# EAGLE board TestBench_rev2 (EAGLE 6.3)
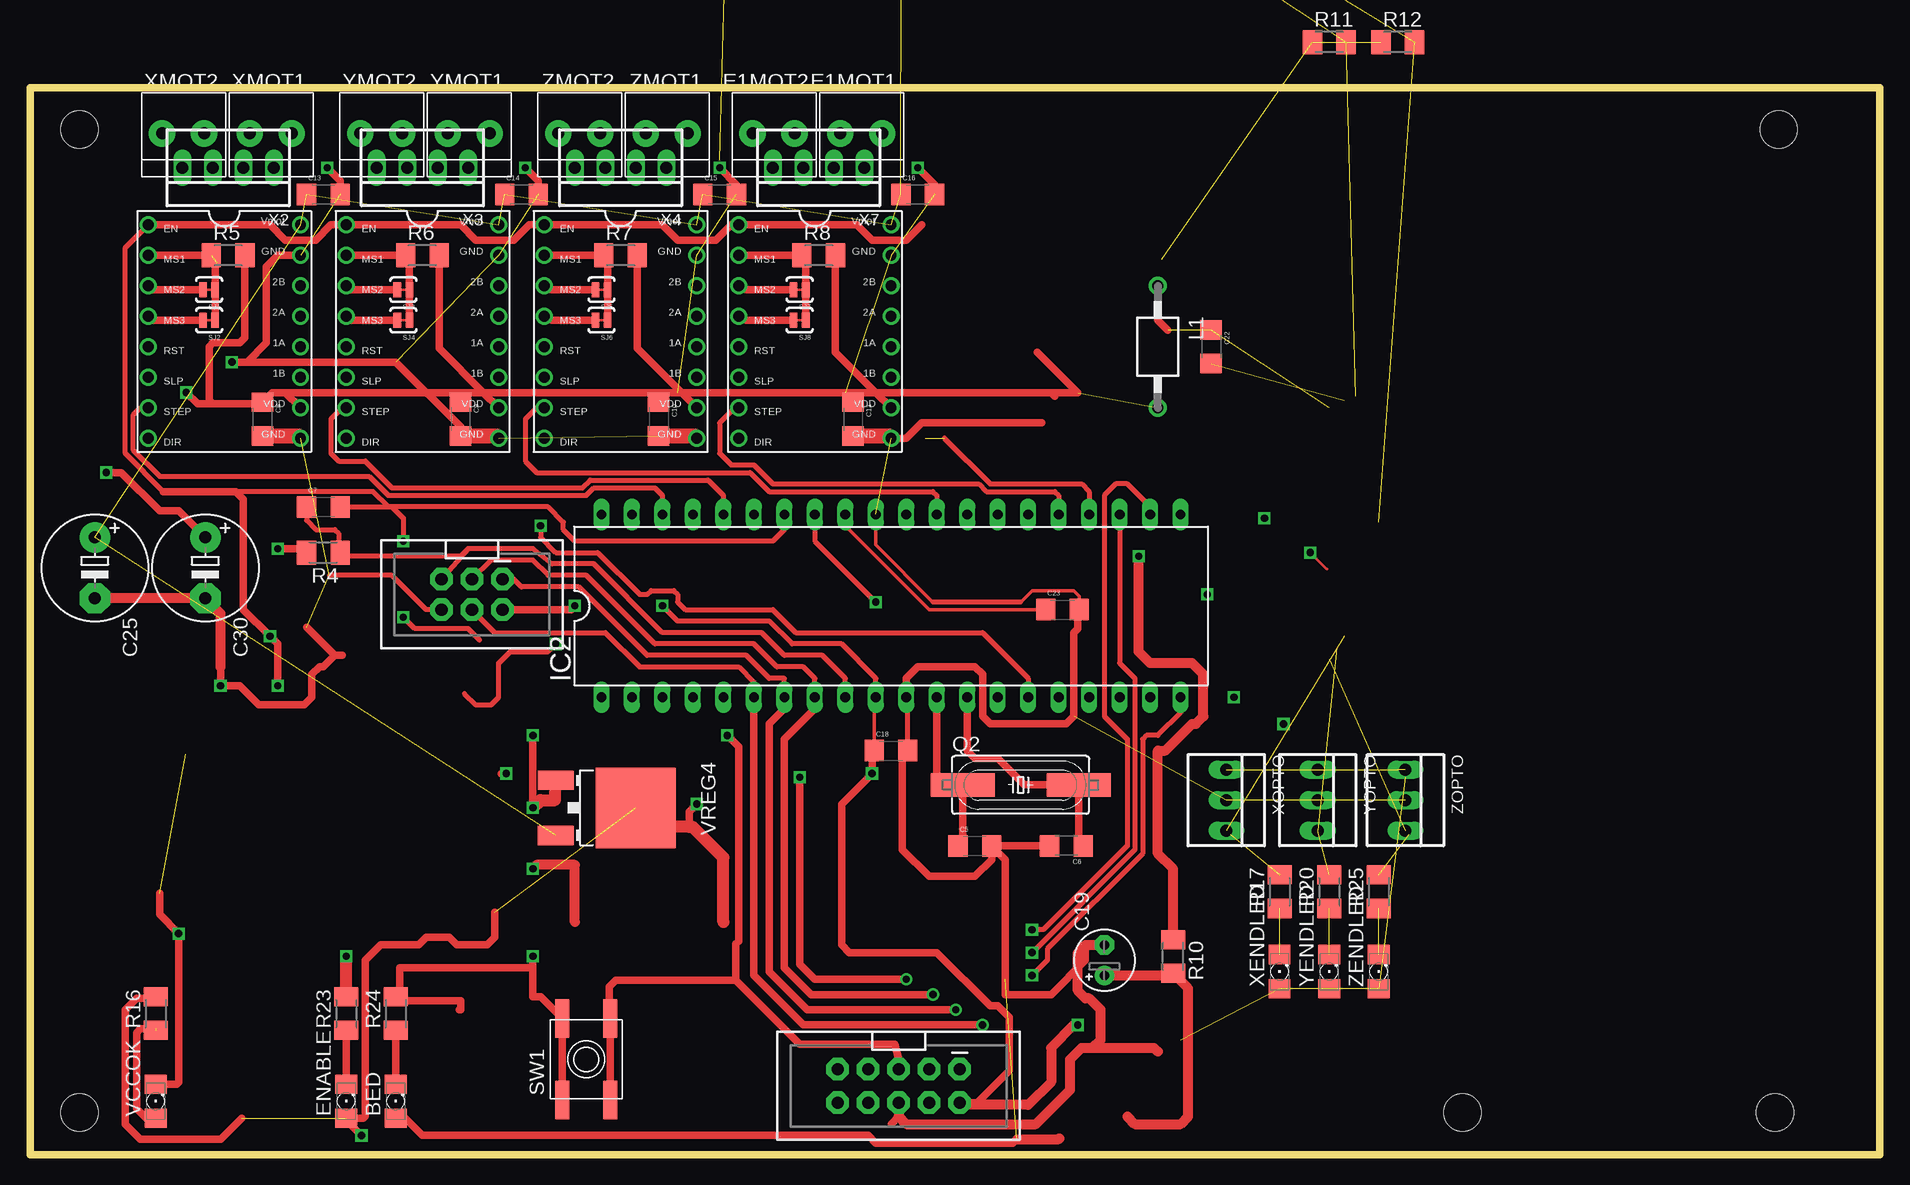
[diagram p0: board, top side]
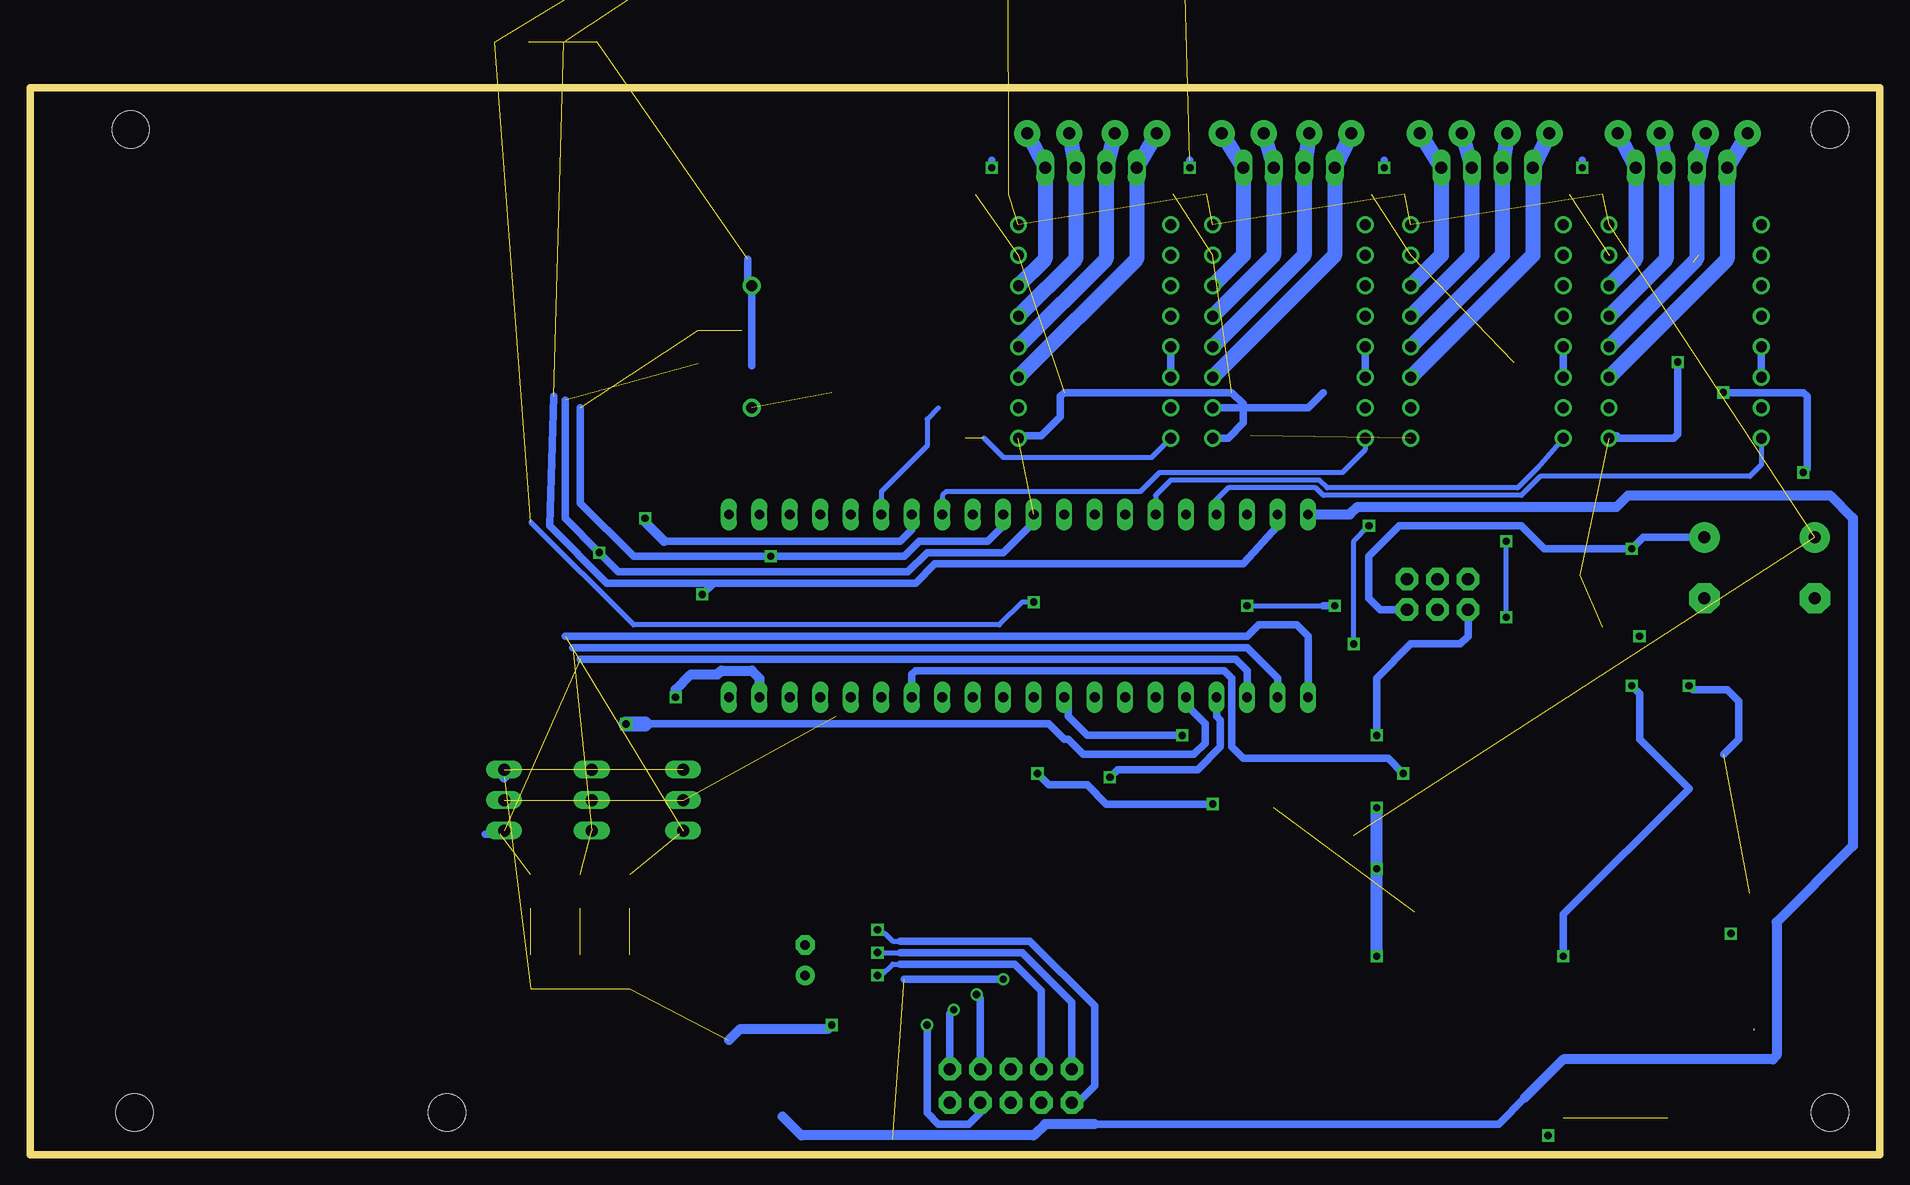
[diagram p1: board, bottom side, seen from below]

Size 154.13 x 88.89 mm. Coordinates in mm from the lower left corner, seen from the top.
Outline: 0,0 154.13,0 154.13,88.89 0,88.89 0,0
Copper layers (1*16): Top 0.035mm / dielectric 1.5mm / Bottom 0.035mm
Design rules "default *": minimum track width 10mil, minimum drill 24mil, track to track 20mil, track to pad 20mil, pad to pad 20mil, via to via 20mil, smd to smd 20mil, copper to edge 40mil, drill to drill 8mil, minimum pad ring 10mil, minimum via ring 8mil, stop-mask expansion 4mil, vias tented up to drill 0mil, thermal gap 10mil

## Footprints (pad centres in the part's own frame; a part is rotated, then mirrored left to right if it is on the bottom)
1206 = smd 1.6 x 1.803: A -1.422,0; C 1.422,0
1206' = smd 1.6 x 1.8: 1 -1.4,0; 2 1.4,0
E2,5-5 = drill 0.813 pad 1.6: + -1.27,0 | drill 0.813 pad 1.6 octagon: - 1.27,0
E5-8,5 = drill 1.016 pad 2.54: + -2.54,0 | drill 1.016 pad 2.54 octagon: - 2.54,0
3.5MMTERM = drill 1 pad 2.184: 1 1.8,0; 2 -1.7,0
A4988BREAKOUT = drill 0.9: 1A 8.89,1.27; 1B 11.43,1.27; 2A 6.35,1.27; 2B 3.81,1.27; DIR 16.51,-11.43; EN -1.27,-11.43; GND 16.51,1.27; GND@0 1.27,1.27; MS1 1.27,-11.43; MS2 3.81,-11.43; MS3 6.35,-11.43; RST 8.89,-11.43; SLP 11.43,-11.43; STEP 13.97,-11.43; VDD 13.97,1.27; VMOT -1.27,1.27
22-23-2021 = drill 1 long: 1 -1.27,0; 2 1.27,0
DIL40 = drill 0.813 long: 1 -24.13,-7.62; 2 -21.59,-7.62; 3 -19.05,-7.62; 4 -16.51,-7.62; 5 -13.97,-7.62; 6 -11.43,-7.62; 7 -8.89,-7.62; 8 -6.35,-7.62; 9 -3.81,-7.62; 10 -1.27,-7.62; 11 1.27,-7.62; 12 3.81,-7.62; 13 6.35,-7.62; 14 8.89,-7.62; 15 11.43,-7.62; 16 13.97,-7.62; 17 16.51,-7.62; 18 19.05,-7.62; 19 21.59,-7.62; 20 24.13,-7.62; 21 24.13,7.62; 22 21.59,7.62; 23 19.05,7.62; 24 16.51,7.62; 25 13.97,7.62; 26 11.43,7.62; 27 8.89,7.62; 28 6.35,7.62; 29 3.81,7.62; 30 1.27,7.62; 31 -1.27,7.62; 32 -3.81,7.62; 33 -6.35,7.62; 34 -8.89,7.62; 35 -11.43,7.62; 36 -13.97,7.62; 37 -16.51,7.62; 38 -19.05,7.62; 39 -21.59,7.62; 40 -24.13,7.62
2X3-SHROUDED = drill 1.016 pad 1.88 octagon: 1 -1.27,2.54; 2 1.27,2.54; 3 -1.27,0; 4 1.27,0; 5 -1.27,-2.54; 6 1.27,-2.54
BL01RN1A = drill 0.9 pad 1.5: 1 -5.08,0; 2 5.08,0
2X5-SHROUDED_LOCK = drill 1.016 pad 1.88 octagon: 1 -1.397,5.08; 2 1.397,5.08; 3 -1.397,2.54; 4 1.397,2.54; 5 -1.397,0; 6 1.397,0; 7 -1.397,-2.54; 8 1.397,-2.54; 9 -1.397,-5.08; 10 1.397,-5.08
HC49UP = smd 5.334 x 1.93: 1 -4.826,0; 2 4.826,0
M1206 = smd 1.6 x 2: 1 -1.4,0; 2 1.4,0
SJ_2S-TRACE = smd 0.635 x 1.27: 1 -0.508,0; 2 0.508,0
EVQ-Q2 = smd 3.2 x 1.2: A -3.4,-2; A' 3.4,-2; B -3.4,2; B' 3.4,2
3MMHOLE = hole 3.1: 0,0
W237-102 = drill 1.194 long: 1 -2.5,-1.27; 2 2.5,-1.27
DPAK = smd 1.6 x 3: 1 -2.3,-6.65; 3 2.3,-6.65 | smd 6.7 x 6.7: 2 0,0
22-23-2041 = drill 1 long: 1 -3.81,0; 2 -1.27,0; 3 1.27,0; 4 3.81,0
22-23-2031 = drill 1 long: 1 -2.54,0; 2 0,0; 3 2.54,0

## Placement (x,y rotation side)
BED  [1206]  30.48,4.45 90 top
C5  22  [1206']  78.74,25.72 0 top
C6  22  [1206']  86.36,25.72 180 top
C7  0.1u  [1206']  24.45,53.98 0 top
C8  0.1u  [1206']  19.37,61.28 270 top
C9  0.1u  [1206']  35.88,61.28 270 top
C10  0.1u  [1206']  52.39,61.28 270 top
C11  0.1u  [1206']  68.58,61.28 270 top
C13  0.1u  [1206']  24.45,80.01 0 top
C14  0.1u  [1206']  40.96,80.01 0 top
C15  0.1u  [1206']  57.47,80.01 0 top
C16  0.1u  [1206']  73.98,80.01 0 top
C18  0.1u  [1206']  71.75,33.66 0 top
C19  10u  [E2,5-5]  89.53,16.19 90 top
C20  10u  [E2,5-5]  58.74,127.64 90 top  (outside the outline)
C21  10u  [E2,5-5]  55.24,130.49 90 top  (outside the outline)
C22  0.1u  [1206']  98.42,67.31 270 top
C23  0.1u  [1206']  86.04,45.4 0 top
C25  100u  [E5-8,5]  5.4,48.9 270 top
C30  100u  [E5-8,5]  14.61,48.9 270 top
E1MOT1  1X2-3.5MM  [3.5MMTERM]  69.22,85.09 0 top
E1MOT2  1X2-3.5MM  [3.5MMTERM]  61.91,85.09 0 top
ENABLE  [1206]  26.35,4.45 90 top
EPOLOLU  POLOLU_A4983CARRIER  [A4988BREAKOUT]  70.48,76.2 270 top
EXTTHERM  22-23-2021  [22-23-2021]  55.88,132.72 270 top  (outside the outline)
EXTTHERM2  22-23-2021  [22-23-2021]  58.1,137.16 270 top  (outside the outline)
IC2  ATMEGA644-20PU  [DIL40]  71.75,45.72 0 top
J2  [2X3-SHROUDED]  36.83,46.67 270 top
L1  10uH  [BL01RN1A]  93.98,67.31 270 top
LCDCONNECTOR  M05X2SHD_LOCK  [2X5-SHROUDED_LOCK]  72.39,5.71 270 top
Q2  20mHz  [HC49UP]  82.55,30.8 0 top
R4  10k  [M1206]  24.45,50.16 180 top
R5  1K  [M1206]  16.51,74.93 0 top
R6  1K  [M1206]  32.7,74.93 0 top
R7  1K  [M1206]  49.21,74.93 0 top
R8  1K  [M1206]  65.72,74.93 0 top
R10  4k7  [M1206]  95.25,16.51 270 top
R11  4k7  [M1206]  108.27,92.71 0 top  (outside the outline)
R12  4k7  [M1206]  113.98,92.71 0 top  (outside the outline)
R16  1k  [M1206]  10.48,11.75 90 top
R17  1k  [M1206]  104.14,21.91 90 top
R20  1k  [M1206]  108.27,21.91 90 top
R23  1k  [M1206]  26.35,11.75 90 top
R24  1k  [M1206]  30.48,11.75 90 top
R25  1k  [M1206]  112.39,21.91 90 top
SJ1  SOLDERJUMPERTRACE  [SJ_2S-TRACE]  14.92,72.07 180 top
SJ2  SOLDERJUMPERTRACE  [SJ_2S-TRACE]  14.92,69.53 180 top
SJ3  SOLDERJUMPERTRACE  [SJ_2S-TRACE]  31.11,72.07 180 top
SJ4  SOLDERJUMPERTRACE  [SJ_2S-TRACE]  31.11,69.53 180 top
SJ5  SOLDERJUMPERTRACE  [SJ_2S-TRACE]  47.62,72.07 180 top
SJ6  SOLDERJUMPERTRACE  [SJ_2S-TRACE]  47.62,69.53 180 top
SJ7  SOLDERJUMPERTRACE  [SJ_2S-TRACE]  64.14,72.07 180 top
SJ8  SOLDERJUMPERTRACE  [SJ_2S-TRACE]  64.14,69.53 180 top
SW1  SPST_TACT-EVQQ2  [EVQ-Q2]  46.35,7.94 90 top
U$1  3MMHOLE  [3MMHOLE]  4.13,3.49 0 top
U$5  3MMHOLE  [3MMHOLE]  119.38,3.49 0 top
U$6  3MMHOLE  [3MMHOLE]  145.41,3.49 0 top
U$7  3MMHOLE  [3MMHOLE]  4.13,85.41 0 top
U$8  3MMHOLE  [3MMHOLE]  145.73,85.41 0 top
VCCOK  [1206]  10.48,4.45 90 top
VMOT  [W237-102]  71.44,138.75 90 top  (outside the outline)
VREG4  [DPAK]  50.48,28.89 270 top
X2  22-23-2041  [22-23-2041]  16.51,82.23 180 top
X3  22-23-2041  [22-23-2041]  32.7,82.23 180 top
X4  22-23-2041  [22-23-2041]  49.21,82.23 180 top
X7  22-23-2041  [22-23-2041]  65.72,82.23 180 top
XENDLED  [1206]  104.14,15.24 90 top
XMOT1  1X2-3.5MM  [3.5MMTERM]  20,85.09 0 top
XMOT2  1X2-3.5MM  [3.5MMTERM]  12.7,85.09 0 top
XOPTO  22-23-2031  [22-23-2031]  99.69,29.53 270 top
XPOLOLU  POLOLU_A4983CARRIER  [A4988BREAKOUT]  21.27,76.2 270 top
YENDLED  [1206]  108.27,15.24 90 top
YMOT1  1X2-3.5MM  [3.5MMTERM]  36.51,85.09 0 top
YMOT2  1X2-3.5MM  [3.5MMTERM]  29.21,85.09 0 top
YOPTO  22-23-2031  [22-23-2031]  107.31,29.53 270 top
YPOLOLU  POLOLU_A4983CARRIER  [A4988BREAKOUT]  37.78,76.2 270 top
ZENDLED  [1206]  112.39,15.24 90 top
ZMOT1  1X2-3.5MM  [3.5MMTERM]  53.02,85.09 0 top
ZMOT2  1X2-3.5MM  [3.5MMTERM]  45.72,85.09 0 top
ZOPTO  22-23-2031  [22-23-2031]  114.62,29.53 270 top
ZPOLOLU  POLOLU_A4983CARRIER  [A4988BREAKOUT]  54.29,76.2 270 top

## Library data of the parts
BED ENABLE VCCOK XENDLED YENDLED ZENDLED = led
C5-C11 C13-C16 C18 C22 C23 SJ1-SJ8 = SparkFun-Passives
C19-C21 C25 C30 = rcl
E1MOT1 E1MOT2 SW1 XMOT1 XMOT2 YMOT1 YMOT2 ZMOT1 ZMOT2 = adafruit
EPOLOLU XPOLOLU YPOLOLU ZPOLOLU = RepRapjr
EXTTHERM EXTTHERM2 = con-molex; MF: MOLEX; MPN: 22-23-2021; OC_FARNELL: 1462926; OC_NEWARK: 25C3832
IC2 = atmel; MPN: ATMEGA644-20PU; OC_FARNELL: 1288340; OC_NEWARK: 23M5060
J2 = SparkFun-Connectors; PROD_ID: CONN-10681
L1 = inductors
LCDCONNECTOR = SparkFun-Connectors
Q2 = adafruit; OC_FARNELL: unknown; OC_NEWARK: unknown
R4-R8 R10-R12 R16 R17 R20 R23-R25 = resistor
U$1 U$5-U$8 = reprap
VMOT = con-wago-500; MPN: 237-102; OC_FARNELL: unknown; OC_NEWARK: 70K9898
VREG4 = dp_devices
X2-X4 X7 = con-molex; MF: MOLEX; MPN: 22-23-2041; OC_FARNELL: 1462920; OC_NEWARK: 38C0355
XOPTO YOPTO ZOPTO = con-molex; MF: MOLEX; MPN: 22-23-2031; OC_FARNELL: 1462950; OC_NEWARK: 30C0862

## Nets
AVCC: C22.1 IC2.30 L1.1 R10.1 R11.1 R12.1
BEDADC: C19.+ IC2.40 R10.2
BEDMSFT: BED.A IC2.4
E1DIR: EPOLOLU.DIR IC2.24
E1STEP: EPOLOLU.STEP IC2.25
E2STEP: IC2.26
E11A: E1MOT2.1 EPOLOLU.1A X7.3
E11B: E1MOT2.2 EPOLOLU.1B X7.4
E12A: E1MOT1.2 EPOLOLU.2A X7.2
E12B: E1MOT1.1 EPOLOLU.2B X7.1
ENABLE: EPOLOLU.EN IC2.34 R23.2 XPOLOLU.EN YPOLOLU.EN ZPOLOLU.EN
EXT2ADC: C21.+ EXTTHERM2.2 IC2.33 R12.2
EXTADC: C20.+ EXTTHERM.2 IC2.39 R11.2
EXTMSFT: IC2.5
EXTMSFT2: IC2.19
FANMSFT: IC2.27
GND: C5.2 C6.2 C8.2 C9.2 C10.2 C11.2 C13.2 C14.2 C15.2 C16.2 C18.2 C19.- C20.- C21.- C22.2 C23.2 C25.- C30.- EPOLOLU.GND EPOLOLU.GND@0 EXTTHERM2.1 EXTTHERM.1 IC2.11 IC2.31 J2.6 LCDCONNECTOR.6 R24.2 SW1.B SW1.B' VCCOK.C VMOT.1 VREG4.1 XOPTO.2 XPOLOLU.GND XPOLOLU.GND@0 YOPTO.2 YPOLOLU.GND YPOLOLU.GND@0 ZOPTO.2 ZPOLOLU.GND ZPOLOLU.GND@0
MCRTS: C7.2
MCRX: IC2.15
MCTX: IC2.14
MCURESET: C7.1 IC2.9 J2.5 LCDCONNECTOR.5 R4.1 SW1.A SW1.A'
MISO: IC2.7 J2.1 LCDCONNECTOR.1
MOSI: IC2.6 J2.4 LCDCONNECTOR.4
N$11: C5.1 IC2.12 Q2.1
N$12: C6.1 IC2.13 Q2.2
N$14: R7.1 SJ5.1 SJ6.1 ZPOLOLU.MS1
N$15: SJ6.2 ZPOLOLU.MS3
N$16: SJ5.2 ZPOLOLU.MS2
N$17: EPOLOLU.MS2 SJ7.2
N$18: EPOLOLU.MS3 SJ8.2
N$19: EPOLOLU.MS1 R8.1 SJ7.1 SJ8.1
N$20: SJ3.2 YPOLOLU.MS2
N$21: SJ4.2 YPOLOLU.MS3
N$22: R6.1 SJ3.1 SJ4.1 YPOLOLU.MS1
N$23: SJ1.2 XPOLOLU.MS2
N$24: SJ2.2 XPOLOLU.MS3
N$25: R5.1 SJ1.1 SJ2.1 XPOLOLU.MS1
N$26: XPOLOLU.RST XPOLOLU.SLP
N$27: YPOLOLU.RST YPOLOLU.SLP
N$28: ZPOLOLU.RST ZPOLOLU.SLP
N$29: EPOLOLU.RST EPOLOLU.SLP
N$34: X4.4 ZMOT2.2 ZPOLOLU.1B
N$35: X4.3 ZMOT2.1 ZPOLOLU.1A
N$36: X4.2 ZMOT1.2 ZPOLOLU.2A
N$37: X4.1 ZMOT1.1 ZPOLOLU.2B
N$38: X3.4 YMOT2.2 YPOLOLU.1B
N$39: X3.3 YMOT2.1 YPOLOLU.1A
N$40: X3.2 YMOT1.2 YPOLOLU.2A
N$41: X3.1 YMOT1.1 YPOLOLU.2B
N$42: X2.4 XMOT2.2 XPOLOLU.1B
N$43: X2.3 XMOT2.1 XPOLOLU.1A
N$44: X2.2 XMOT1.2 XPOLOLU.2A
N$45: X2.1 XMOT1.1 XPOLOLU.2B
N$54: C23.1 IC2.32
N$57: R17.1 XENDLED.C
N$59: BED.C R24.1
N$60: R20.1 YENDLED.C
N$62: R25.1 ZENDLED.C
N$64: R16.1 VCCOK.A
N$71: ENABLE.C R23.1
N$73: LCDCONNECTOR.8
PSON: IC2.21
SCK: IC2.8 J2.3 LCDCONNECTOR.3
SCL: IC2.22 LCDCONNECTOR.10
SDA: IC2.23 LCDCONNECTOR.9
SDS: IC2.20 LCDCONNECTOR.7
UNUSED1: IC2.16
UNUSED2: IC2.17
UNUSED3: IC2.18
VCC: C8.1 C9.1 C10.1 C11.1 C18.1 C30.+ ENABLE.A EPOLOLU.VDD IC2.10 J2.2 L1.2 LCDCONNECTOR.2 R4.2 R5.2 R6.2 R7.2 R8.2 R16.2 VREG4.2 XENDLED.A XOPTO.1 XPOLOLU.VDD YENDLED.A YOPTO.1 YPOLOLU.VDD ZENDLED.A ZOPTO.1 ZPOLOLU.VDD
VMOT: C13.1 C14.1 C15.1 C16.1 C25.+ EPOLOLU.VMOT VMOT.2 VREG4.3 XPOLOLU.VMOT YPOLOLU.VMOT ZPOLOLU.VMOT
XDIR: IC2.37 XPOLOLU.DIR
XEND: IC2.1 R17.2 XOPTO.3
XSTEP: IC2.38 XPOLOLU.STEP
YDIR: IC2.35 YPOLOLU.DIR
YEND: IC2.2 R20.2 YOPTO.3
YSTEP: IC2.36 YPOLOLU.STEP
ZDIR: IC2.28 ZPOLOLU.DIR
ZEND: IC2.3 R25.2 ZOPTO.3
ZSTEP: IC2.29 ZPOLOLU.STEP

## Tracks (layer width: path | path; a pad name or v marks a point on that pad's centre or on a via)
AVCC  (via drill 0.6)  (4 unrouted)
  Top 0.61: 94.8,68.71 93.98,69.53 L1.1
  Top 0.813: R10.1 95.25,23.81 93.98,25.08 93.98,33.66 94.61,33.66 96.84,35.88 97.16,35.88 97.79,36.51 97.79,40.01 96.84,40.96 93.34,40.96 92.39,41.91 v92.39,49.85
  Bottom 0.61: IC2.30 73.03,52.39 74.3,51.12 80.01,51.12 81.28,49.85 v92.39,49.85 103.82,49.85 108.27,54.29 108.27,62.23 | 93.98,72.07 L1.1 | 93.98,65.72 93.98,72.07 | 93.98,72.07 94.3,72.39 94.3,74.61
BEDADC  (1 unrouted)
  Top 0.813: C19.+ 95.06,14.92 R10.2 96.52,13.84 96.52,3.17 95.89,2.54 92.08,2.54 91.44,3.17
  Bottom 0.61: 65.41,2.54 31.75,2.54 29.53,4.76
  Bottom 0.813: IC2.40 44.13,53.34 43.5,53.98 21.91,53.98 20.95,54.93 4.13,54.93 2.22,53.02 2.22,25.72 8.57,19.37 8.57,8.26 8.89,7.94 26.35,7.94 29.53,4.76 | 65.41,2.54 69.53,2.54 70.48,1.59 89.85,1.59 91.44,3.17
BEDMSFT  (via drill 0.6)  (1 unrouted)
  Top 0.61: v73.03,14.61 65.41,14.61 64.14,15.88 v64.14,31.43 | BED.A 31.27,3.02 32.7,1.59 69.85,1.59 70.48,0.95 81.92,0.95 82.23,1.27
  Top 0.813: 82.23,1.27 85.62,1.27 arc45 85.8,1.34
  Bottom 0.61: IC2.4 55.24,36.51 54.93,36.2 54.93,33.97 56.83,32.07 63.5,32.07 v64.14,31.43 | v73.03,14.61 81.28,14.61
E1DIR  (1 unrouted)
  Top 0.406: 76.2,59.69 80.01,55.88 87.63,55.88 88.27,55.24 IC2.24
  Bottom 0.406: 74.61,59.69 73.03,58.1 60.64,58.1 EPOLOLU.DIR
E1STEP
  Top 0.406: EPOLOLU.STEP 58.74,62.23 57.47,60.96 57.47,58.42 58.42,57.47 60.33,57.47 61.91,55.88 79.06,55.88 79.69,55.24 85.41,55.24 85.72,54.93 IC2.25
E2STEP
  Bottom 0.406: 78.42,62.23 79.38,61.28 79.38,59.05 83.19,55.24 IC2.26
E11A
  Bottom 1.27: E1MOT2.1 X7.3 64.45,74.61 EPOLOLU.1A
E11B
  Bottom 1.27: E1MOT2.2 X7.4 61.91,74.61 EPOLOLU.1B
E12A
  Bottom 1.27: E1MOT1.2 X7.2 66.99,74.61 EPOLOLU.2A
E12B
  Bottom 1.27: E1MOT1.1 X7.1 69.53,74.61 EPOLOLU.2B
ENABLE  (via drill 0.6)
  Top 0.406: IC2.34 62.87,52.07 61.91,51.12 45.4,51.12 44.45,52.07 44.45,52.7 43.18,53.98 29.84,53.98 28.57,55.24 11.11,55.24 7.94,58.42 7.94,75.56 XPOLOLU.EN
  Top 0.61: 74.3,77.47 73.03,76.2 70.17,76.2 68.9,77.47 EPOLOLU.EN 58.42,77.47 57.15,76.2 53.98,76.2 52.7,77.47 ZPOLOLU.EN 41.59,77.47 40.32,76.2 37.15,76.2 35.88,77.47 YPOLOLU.EN 25.08,77.47 23.81,76.2 21.27,76.2 20,77.47 XPOLOLU.EN | 11.11,55.24 17.14,55.24 17.78,54.61 17.78,45.4 v20,43.18 20.64,42.55 v20.64,39.05
  Top 1.016: R23.2 v26.35,16.51
  Bottom 0.61: v26.35,16.51 26.35,20 15.88,30.48 20,34.61 20,38.42 v20.64,39.05
EXT2ADC  (via drill 0.6)  (3 unrouted)
  Top 0.406: IC2.33 65.41,51.12 v70.48,46.04
  Bottom 0.406: v70.48,46.04 71.44,46.04 73.34,44.13 103.82,44.13 112.39,52.7
EXTADC  (via drill 0.6)  (3 unrouted)
  Bottom 0.61: IC2.39 50.16,52.39 53.02,49.21 78.74,49.21 80.33,47.62 97.16,47.62 | 97.16,47.62 v98.11,46.67 | 97.16,47.62 106.05,47.62 110.81,52.39 110.49,63.18
EXTMSFT  (via drill 0.6)
  Bottom 0.61: IC2.5 57.78,37.47 56.2,35.88 56.2,34.29 57.15,33.34 66.36,33.34 67.63,34.61 67.94,34.61 69.22,35.88 102.87,35.88 | v104.46,35.88 104.78,35.88
  Bottom 1.27: v104.46,35.88 102.87,35.88
EXTMSFT2  (via drill 0.6)
  Bottom 0.813: v100.33,38.1 100.33,38.73 99.06,40.01 96.84,40.01 96.52,40.32 93.98,40.32 93.34,39.69 IC2.19
FANMSFT  (via drill 0.6)
  Bottom 0.61: IC2.27 80.64,52.07 81.6,51.12 101.28,51.12
  Bottom 0.813: v102.87,53.02 102.87,52.7 101.28,51.12
GND  (via drill 0.6)  (21 unrouted)
  Top 0.254: 108.07,48.77 v106.68,50.16
  Top 0.305: 73.16,37.97 IC2.11 | C23.2 87.44,46.54 87,46.99 83.5,46.99 82.55,46.04 | 75.25,46.04 70.48,50.8 IC2.31
  Top 0.406: C18.2 73.16,37.97 | 82.55,46.04 75.25,46.04 | J2.6 33.02,45.4 30.16,48.26 24.95,48.26
  Top 0.61: C13.2 25.85,81.15 v24.77,82.23 | C14.2 42.36,81.15 v41.27,82.23 | C15.2 58.87,80.83 v57.47,82.23 | C16.2 75.38,80.83 v73.98,82.23 | 15.88,40.64 v15.88,39.05 17.46,39.05 19.05,37.47 22.86,37.47 23.5,38.1 23.5,40.01 24.13,40.64 24.45,40.64 25.4,41.59 | VCCOK.C 12.22,5.87 12.38,6.03 v12.38,18.41 10.79,20 10.79,21.78 | 26.04,41.59 25.4,41.59 | 23.05,43.95 25.4,41.59 | 71.75,2.54 72.39,3.17 | 87.95,17.46 87.95,16.19 85.09,13.34 81.28,13.34 81.28,24.58 C5.2 | C5.2 C6.2 | C5.2 80.14,24.58 78.74,23.18 74.93,23.18 72.71,25.4 72.71,33.21 C18.2 | IC2.11 73.03,39.69 73.98,40.64 78.74,40.64 79.38,40.01 79.38,36.51 80.01,35.88 86.36,35.88 87,36.51 87,43.5 87.31,43.81 87.31,45.27 C23.2 | EPOLOLU.GND 73.03,59.69 74.3,60.96 84.33,60.96 | C9.2 35.88,60.64 30.48,66.04 v16.83,66.04 18.1,66.04 19.68,67.63 19.68,73.98 20.64,74.93 XPOLOLU.GND@0 | R24.2 30.8,12.83 | 30.8,12.83 30.8,15.56 41.91,15.56 v41.91,16.51 41.91,13.15 42.55,13.15 SW1.B' SW1.B | 30.8,12.83 35.88,12.83 35.88,12.06 35.78,12.06 | v41.91,28.89 v41.91,34.92
  Top 0.813: 45.4,19.37 45.4,24.13 42.23,24.13 v41.91,23.81 | 15.88,40.64 15.88,44.98 arc45 15.8,45.16 C30.- C25.- | LCDCONNECTOR.6 72.39,3.17 73.03,2.54 83.82,2.54 86.68,5.4 86.68,7.94 87.63,8.89 88.58,8.89 | 88.58,8.89 93.66,8.89 93.98,8.57 | 88.58,8.89 89.22,9.53 89.22,12.06 88.27,13.02 87.95,13.02 87.31,13.65 87.31,16.83 87.95,17.46 C19.-
  Top 1.016: v41.91,28.89 42.55,29.53 43.76,29.53 VREG4.1
  Top 1.27: C11.2 71.57,59.88 EPOLOLU.GND | C10.2 55.38,59.88 ZPOLOLU.GND | C9.2 38.87,59.88 YPOLOLU.GND | C8.2 22.36,59.88 XPOLOLU.GND
  Bottom 0.254: 109.54,53.02 109.54,62.55
  Bottom 0.61: v24.77,82.23 24.77,82.87 | v41.27,82.23 41.27,82.87 | v57.47,82.23 57.47,82.87 | v73.98,82.23 73.98,82.87 | 13,33.36 11.75,34.61 11.75,37.78 12.7,38.73 15.56,38.73 v15.88,39.05 | v41.91,16.51 41.91,17.14 | IC2.31 70.48,52.7 73.03,50.16 79.38,50.16 80.96,48.58 105.09,48.58 v106.68,50.16 109.54,53.02 109.54,62.87 | ZPOLOLU.GND 54.29,59.69 53.02,60.96 53.02,62.55 53.98,63.5 67.94,63.5 68.26,63.18 68.26,61.47 69.85,59.88 71.57,59.88 EPOLOLU.GND | v41.91,34.92 41.91,39.69 39.05,42.55 34.92,42.55 34.29,43.18 J2.6 | v16.83,66.04 16.83,60.01 17.14,59.69 21.72,59.69 21.91,59.88 22.36,59.88 XPOLOLU.GND
  Bottom 1.016: 41.91,17.14 v41.91,23.81 v41.91,28.89
MCRTS  (via drill 0.6)
  Top 0.406: 37.47,42.86 36.51,43.81 32.07,43.81 v31.11,44.77 | C7.2 30.16,53.98 31.11,53.02 v31.11,51.12
  Bottom 0.406: v31.11,44.77 v31.11,51.12
MCRX  (via drill 0.6)
  Top 0.406: IC2.15 83.19,39.69 79.38,43.5 63.82,43.5 61.91,45.4 54.61,45.4 53.98,46.04 53.98,46.67 53.66,46.99 51.75,46.99 51.44,46.67 50.8,46.67 47.31,50.16 43.81,50.16 42.55,51.44 v42.55,52.39 | 36.2,38.42 37.15,37.47 38.42,37.47 39.05,38.1 39.05,40.96 40.01,41.91 43.18,41.91 v43.81,42.55
  Bottom 0.406: v43.81,42.55 43.81,51.12 v42.55,52.39
MCTX  (via drill 0.6)
  Top 0.61: v39.69,31.75 39.29,31.75
  Bottom 0.61: IC2.14 80.64,40.01 80.33,40.32 54.61,40.32 53.98,39.69 53.98,33.97 53.02,33.02 40.96,33.02 v39.69,31.75
MCURESET  (via drill 0.6)
  Top 0.406: IC2.9 67.94,39.69 66.04,41.59 62.87,41.59 60.96,43.5 52.7,43.5 46.99,49.21 43.5,49.21 41.91,50.48 36.51,50.48 | 36.51,50.48 J2.5 | 36.51,50.48 35.88,49.85 26.48,49.85 R4.1 25.72,50.3 25.72,51.75 25.4,52.07 23.81,52.07 23.05,52.84 C7.1
  Top 0.61: v58.1,34.92 59.05,33.97 59.05,17.78 58.83,17.56 58.83,14.51 | LCDCONNECTOR.5 72.39,7.94 72.07,9.21 64.14,9.21 58.83,14.51 | SW1.A SW1.A' 48.26,11.43 48.26,13.97 48.8,14.51 58.83,14.51
  Bottom 0.61: v58.1,34.92 66.04,34.92 67.63,36.51 67.63,37.78 IC2.9
MISO  (via drill 0.6)
  Top 0.406: IC2.7 62.87,39.69 61.59,39.69 59.69,41.59 51.44,41.59 45.72,47.31 40.96,47.31 40.32,47.94 J2.1
  Top 0.61: IC2.7 62.87,37.15 61.59,35.88 61.59,15.24 64.77,12.06 v77.15,12.06
  Bottom 0.61: LCDCONNECTOR.1 77.47,11.75 v77.15,12.06
MOSI  (via drill 0.6)
  Top 0.406: IC2.6 60.33,39.37 59.05,40.64 50.8,40.64 47.94,43.5 38.73,43.5 J2.4
  Top 0.61: IC2.6 60.33,14.92 64.45,10.79 v79.38,10.79
  Bottom 0.61: v79.38,10.79 79.38,3.49 78.42,2.54 75.88,2.54 74.93,3.49 LCDCONNECTOR.4
N$11
  Top 0.61: C5.1 77.72,26.1 Q2.1 76.52,30.8 75.56,31.75 IC2.12
N$12
  Top 0.61: C6.1 87.38,26.1 Q2.2 82.87,30.8 80.64,33.02 78.74,33.02 78.11,33.66 IC2.13
N$14
  Top 0.61: ZPOLOLU.MS1 R7.1 48.13,74.61 SJ5.1 SJ6.1
N$15
  Top 0.61: SJ6.2 43.5,69.53 ZPOLOLU.MS3
N$16
  Top 0.61: SJ5.2 43.5,72.07 ZPOLOLU.MS2
N$17
  Top 0.61: SJ7.2 59.69,72.07 EPOLOLU.MS2
N$18
  Top 0.61: SJ8.2 59.69,69.53 EPOLOLU.MS3
N$19
  Top 0.61: SJ8.1 SJ7.1 64.64,74.61 R8.1 EPOLOLU.MS1
N$20
  Top 0.61: SJ3.2 26.67,72.07 YPOLOLU.MS2
N$21
  Top 0.61: SJ4.2 26.67,69.53 YPOLOLU.MS3
N$22
  Top 0.61: YPOLOLU.MS1 R6.1 31.62,74.61 SJ3.1 SJ4.1
N$23
  Top 0.61: SJ1.2 10.16,72.07 XPOLOLU.MS2
N$24
  Top 0.61: SJ2.2 10.16,69.53 XPOLOLU.MS3
N$25  (1 unrouted)
  Top 0.61: R5.1 XPOLOLU.MS1 | 15.56,74.3 15.43,74.17 SJ1.1 SJ2.1
N$26
  Bottom 0.61: XPOLOLU.RST XPOLOLU.SLP
N$27
  Bottom 0.61: YPOLOLU.RST YPOLOLU.SLP
N$28
  Bottom 0.61: ZPOLOLU.RST ZPOLOLU.SLP
N$29
  Bottom 0.61: EPOLOLU.RST EPOLOLU.SLP
N$34
  Bottom 1.27: ZMOT2.2 X4.4 45.4,74.93 ZPOLOLU.1B
N$35
  Bottom 1.27: ZMOT2.1 X4.3 47.94,74.93 ZPOLOLU.1A
N$36
  Bottom 1.27: ZMOT1.2 X4.2 50.48,74.93 ZPOLOLU.2A
N$37
  Bottom 1.27: ZMOT1.1 X4.1 53.02,74.93 ZPOLOLU.2B
N$38
  Bottom 1.27: YMOT2.2 X3.4 28.89,74.93 YPOLOLU.1B
N$39
  Bottom 1.27: YMOT2.1 X3.3 31.43,74.93 YPOLOLU.1A
N$40
  Bottom 1.27: YMOT1.2 X3.2 33.97,74.93 YPOLOLU.2A
N$41
  Bottom 1.27: YMOT1.1 X3.1 36.51,74.93 YPOLOLU.2B
N$42
  Bottom 1.27: XMOT2.2 X2.4 12.7,74.61 XPOLOLU.1B
N$43
  Bottom 1.27: XMOT2.1 X2.3 15.24,74.61 XPOLOLU.1A
N$44
  Bottom 1.27: XMOT1.2 X2.2 17.78,74.61 XPOLOLU.2A
N$45
  Bottom 1.27: XMOT1.1 X2.1 20.32,74.61 XPOLOLU.2B
N$54
  Top 0.305: C23.1 74.93,45.4 67.94,52.39 IC2.32
N$57  (1 unrouted)
N$59
  Top 0.61: BED.C R24.1
N$60  (1 unrouted)
N$62  (1 unrouted)
N$64  (1 unrouted)
  Top 0.61: VCCOK.A 9.68,3.02 8.89,3.81 8.89,10.16 9.21,10.48 9.84,10.48 10.16,10.16 10.48,10.16 10.48,10.48
N$71
  Top 0.61: ENABLE.C R23.1
SCK  (via drill 0.6)
  Top 0.406: IC2.8 65.41,39.69 64.45,40.64 62.23,40.64 60.33,42.55 52.07,42.55 46.35,48.26 43.18,48.26 41.91,49.53 38.42,49.53 J2.3
  Top 0.61: IC2.8 65.41,37.15 62.87,34.61 62.87,15.56 65.09,13.34 v75.25,13.34
  Bottom 0.61: LCDCONNECTOR.3 74.93,13.02 v75.25,13.34
SCL  (via drill 0.6)
  Top 0.406: IC2.22 93.34,53.98 91.44,55.88 90.49,55.88 89.53,54.93 89.53,36.51 91.44,34.61 91.44,25.72 84.45,18.73 v83.5,18.73
  Bottom 0.406: v83.5,18.73 82.87,18.41 82.23,17.78 80.96,17.78
  Bottom 0.61: LCDCONNECTOR.10 66.8,4.32 65.41,5.71 65.41,12.38 70.8,17.78 80.96,17.78 81.6,17.78
SDA  (via drill 0.6)
  Top 0.406: IC2.23 90.81,40.96 92.08,39.69 92.08,25.4 v83.5,16.83
  Bottom 0.406: v83.5,16.83 81.6,16.83
  Bottom 0.61: LCDCONNECTOR.9 67.31,12.7 71.44,16.83 81.6,16.83
SDS  (via drill 0.6)
  Top 0.406: IC2.20 95.89,36.83 93.98,34.92 93.03,34.92 92.71,34.61 92.71,25.08 84.77,17.14 84.77,16.19 v83.5,14.92
  Bottom 0.406: v83.5,14.92 83.19,14.92 82.23,15.88 81.6,15.88
  Bottom 0.61: LCDCONNECTOR.7 69.85,13.65 72.07,15.88 81.6,15.88
VCC  (via drill 0.6)  (10 unrouted)
  Top 0.305: C18.1 70.36,37.97 IC2.10
  Top 0.406: IC2.10 70.48,39.69 67.63,42.55 63.5,42.55 61.59,44.45 53.98,44.45 v52.7,45.72 | 22.54,49.53 R4.2
  Top 0.61: 85.09,63.5 70.48,63.5 | 70.48,63.5 68.58,63.5 | 68.58,63.5 53.98,63.5 | 52.7,63.5 52.07,63.5 | 21.27,63.5 35.56,63.5 | 52.07,63.5 37.78,63.5 | 37.78,63.5 35.56,63.5 | R6.2 34.1,67.18 37.78,63.5 | 37.78,63.5 YPOLOLU.VDD | R7.2 50.61,67.18 54.13,63.66 | 54.13,63.66 ZPOLOLU.VDD | 21.27,63.5 XPOLOLU.VDD | R8.2 67.12,66.86 70.48,63.5 | 70.48,63.5 EPOLOLU.VDD | 83.95,66.86 87.31,63.5 85.09,63.5 | 21.27,63.5 20.19,63.5 C8.1 19.24,62.55 15.24,62.55 | 85.41,63.18 85.09,63.5 | C11.1 68.58,63.5 | 52.39,63.18 52.07,63.5 | C9.1 35.88,63.18 35.56,63.5 | 17.63,3.02 15.88,1.27 9.21,1.27 7.94,2.54 7.94,12.06 8.89,13.02 10.35,13.02 R16.2 | v27.62,1.59 26.35,2.86 ENABLE.A 27.79,3.02 27.94,3.17 27.94,16.19 29.21,17.46 32.38,17.46 33.02,18.1 34.92,18.1 35.56,17.46 38.1,17.46 38.73,18.1 38.73,20.19 | 57.78,24.77 57.47,24.77 54.93,27.3 54.93,28.57 v55.56,29.21 | C18.1 70.17,33.47 v70.17,31.75 67.63,29.21 67.63,17.46 68.26,16.83 75.56,16.83 80.01,12.38 80.64,12.38 81.6,11.43 81.6,6.99 78.93,4.32 LCDCONNECTOR.2 | C10.1 52.39,63.18 | 52.39,63.18 52.7,63.5 | 52.7,63.5 53.98,63.5 | 53.98,63.5 54.13,63.66 | v20.64,50.48 22.73,50.48 R4.2 | R5.2 17.91,68.08 17.46,67.63 15.24,67.63 14.92,67.31 14.92,62.87 15.24,62.55 | 15.24,62.55 13.97,62.55 v13.02,63.5 | v6.35,56.83 7.62,56.83 10.79,53.66 12.38,53.66 C30.+ | v45.4,45.72 45.09,45.4 J2.2
  Top 0.813: v87.31,10.79 87,10.79 85.09,8.89 85.09,6.03 83.19,4.13 77.66,4.13 LCDCONNECTOR.2
  Top 1.016: 57.78,19.37 57.78,24.77 55.24,27.3 54.93,27.3 52.07,27.3 VREG4.2
  Bottom 0.406: v52.7,45.72 46.35,45.72
  Bottom 0.61: v55.56,29.21 64.45,29.21 66.04,30.8 69.22,30.8 v70.17,31.75 | C30.+ 19.68,51.44 v20.64,50.48 27.94,50.48 29.84,52.39 40.01,52.39 42.55,49.85 42.55,46.35 41.59,45.4 J2.2 | v13.02,63.5 6.35,63.5 6.03,63.18 6.03,57.15 v6.35,56.83 | ZPOLOLU.VDD 47.62,62.23 46.35,63.5 | 46.35,45.72 v45.4,45.72
  Bottom 0.813: 95.89,9.53 94.93,10.48 87.63,10.48 v87.31,10.79 | 113.98,32.07 114.62,31.43
  other vias: 39.37,45.4
VMOT  (10 unrouted)
XDIR
  Bottom 0.406: XPOLOLU.DIR 9.84,57.47 10.79,56.52 28.26,56.52 29.84,54.93 46.35,54.93 46.99,55.56 54.29,55.56 55.24,54.61 IC2.37
XEND  (2 unrouted)
  Bottom 0.61: IC2.1 47.62,43.18 48.58,44.13 51.75,44.13 52.7,43.18 109.54,43.18 | 100.01,26.67 XOPTO.3
XSTEP
  Top 0.406: XPOLOLU.STEP 9.21,62.23 8.57,61.59 8.57,58.74 10.79,56.52 28.26,56.52 29.84,54.93 46.35,54.93 46.99,55.56 52.07,55.56 52.7,54.93 IC2.38
YDIR
  Bottom 0.406: YPOLOLU.DIR 28.57,57.15 30.16,55.56 46.04,55.56 46.67,56.2 59.05,56.2 60.33,54.93 IC2.35
YEND  (2 unrouted)
  Bottom 0.61: IC2.2 50.16,39.69 52.7,42.23 108.9,42.23
YSTEP
  Top 0.406: YPOLOLU.STEP 26.04,62.23 25.08,61.28 25.08,58.42 25.72,57.78 27.94,57.78 30.16,55.56 46.04,55.56 46.67,56.2 56.52,56.2 57.78,54.93 IC2.36
ZDIR
  Bottom 0.406: ZPOLOLU.DIR 42.86,58.74 44.77,56.83 60.01,56.83 61.59,55.24 77.79,55.24 78.11,54.93 IC2.28
ZEND  (2 unrouted)
  Bottom 0.61: IC2.3 52.7,40.32 53.66,41.27 108.27,41.27 | 116.2,26.67 114.94,26.67 ZOPTO.3
ZSTEP
  Top 0.406: ZPOLOLU.STEP 42.23,62.23 41.27,61.28 41.27,57.78 42.23,56.83 60.01,56.83 61.59,55.24 75.25,55.24 75.56,54.93 IC2.29

## Text on the board
OPENHWSILK: X | Y | Z | E | E | 1 | 2 | X | Y | Z | E1 | E2 | ICSP | ATMEGA1284P | MCP2200 | 20Mhz | 12Mhz | USB=1/PSU=0 | LCD/SD PANEL | HEATBED | PSU | USB | TX | RX | MOTORS | HEATBED